# Altium PCB OLED_Xplained_PRO.PcbDoc
Units mm, origin at the board's own origin, x right, y up, seen from the top; angles counter-clockwise.
Board outline 60 x 66.5 mm, 2 copper layers (Top Layer LF-signals, Bottom Layer LF-signals), stack 1.58 mm thick; 36 components, 28 nets, 126 pads, 32 vias.
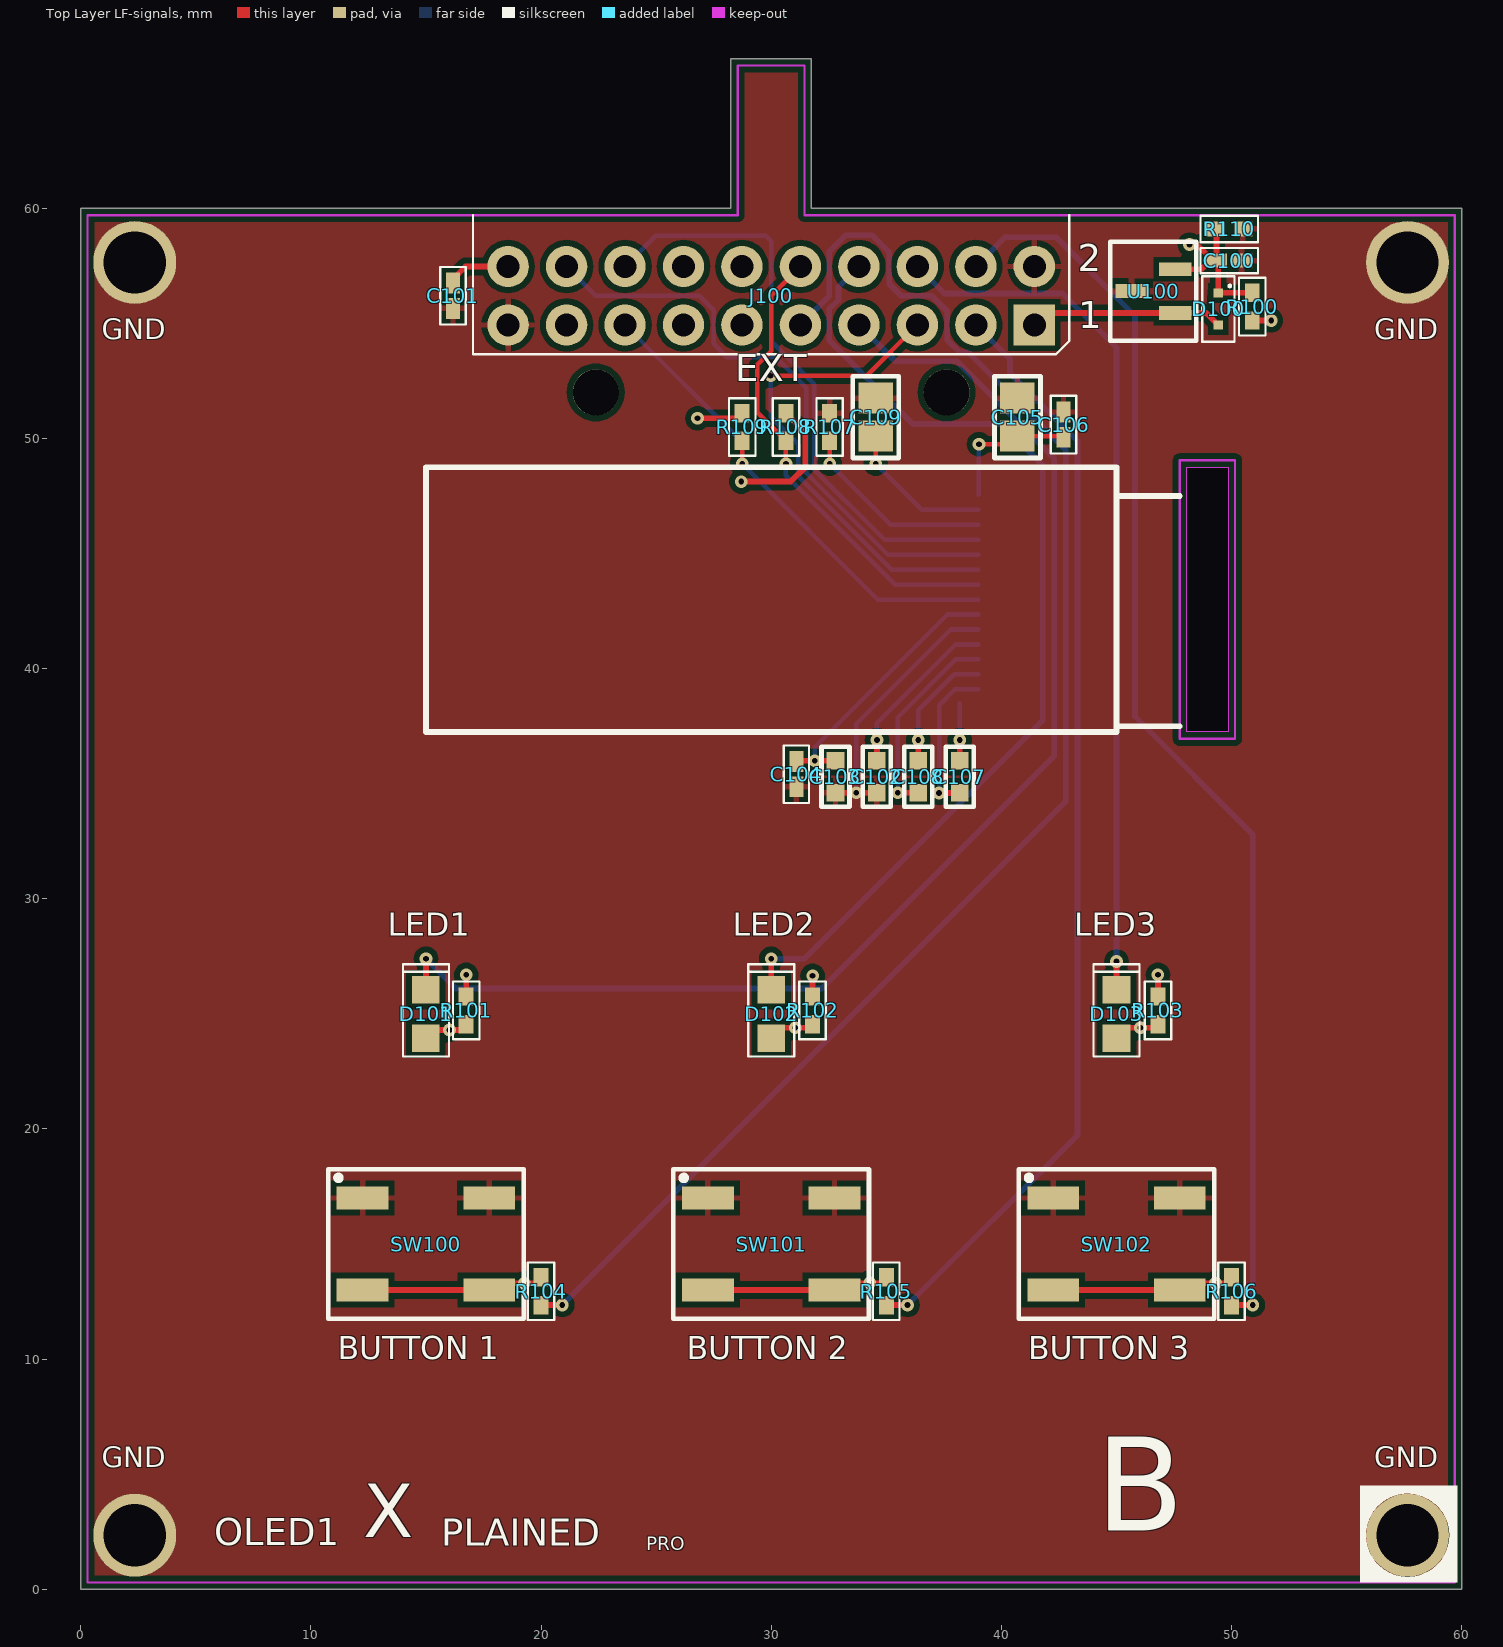
[diagram p0: Top Layer LF-signals view]
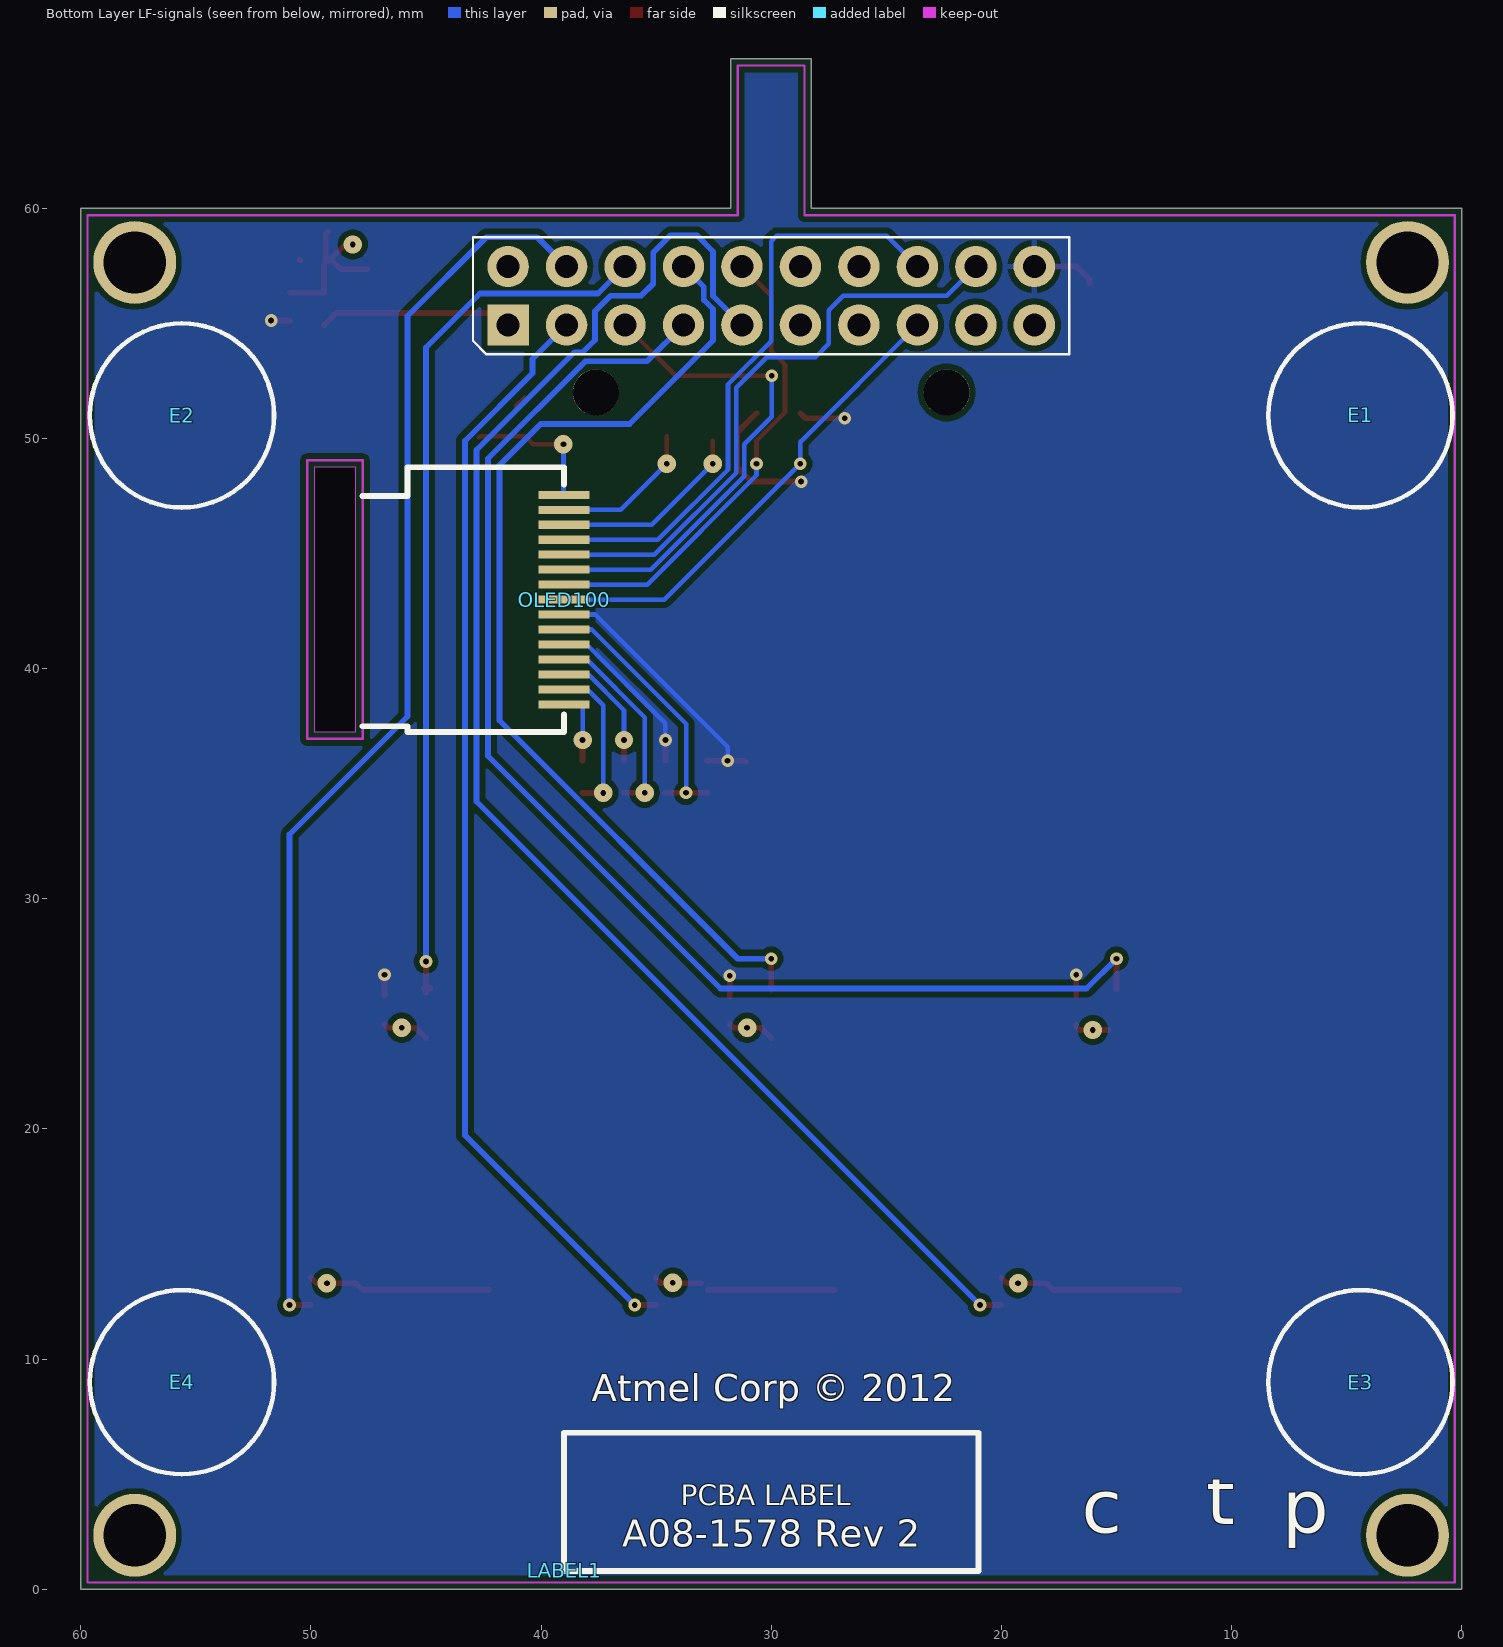
[diagram p1: Bottom Layer LF-signals view, seen from below]

## Layer stack, top to bottom
Top Solder: solder mask 0.0102, Solder Resist, Dk 3.5
Top Layer LF-signals: signal copper 0.035
Dielectric1: core 1.51, FR-4, Dk 4.8
Bottom Layer LF-signals: signal copper 0.035
Bottom Solder: solder mask 0.0102, Solder Resist, Dk 3.5

## Board outline
0,0 0,60 28.25,60 28.25,66.5 31.75,66.5 31.75,60 60,60 60,0
cut-out: 48.05,48.75 49.85,48.75 49.85,37.25 48.05,37.25

## Design rules (kind name [scope] priority, off if disabled: settings)
AcuteAngle [All] p1: minimum=8.50000000000000E+0001 checktracksonly=FALSE
AssemblyTestPointUsage [All] p1: allowmultiple=TRUE
AssemblyTestpoint [All] p1: testpointundercomponent=TRUE minsize=0.55 maxsize=2 preferedsize=0.8 minholesize=0 maxholesize=1 preferedholesize=0.25 testpointgrid=0.025 usegrid=FALSE gridtolerance=0 allowsidebottom=TRUE minspacing=1.27 compbodyclearance=0.127
Clearance Clearance_polygon [All vs InPolygon] p1: gap=0.25
Clearance [All] p2: gap=0.15
DiffPairsRouting [All] p1: maxlimit=0.3 minlimit=0.15 mostfreqgap=0.2 toplayer_minwidth=0.381 toplayer_maxwidth=0.381 toplayer_prefwidth=0.381 bottomlayer_minwidth=0.381 bottomlayer_maxwidth=0.381 bottomlayer_prefwidth=0.381 maxuncoupledlength=20
FabricationTestPointUsage TestPointUsage [All] p1: valid=0 allowmultiple=TRUE
FabricationTestpoint Testpoint [All] p1: side=2 testpointundercomponent=TRUE minsize=0.55 maxsize=2 preferedsize=0.8 minholesize=0 maxholesize=1 preferedholesize=0.25 testpointgrid=0 allowsidebottom=TRUE usegrid=FALSE gridtolerance=0 minspacing=1.27 compbodyclearance=0.127
HoleSize [All] p1: absolutevalues=TRUE maxlimit=10 minlimit=0.25 maxpercent=80.000 minpercent=20.000
HoleToHoleClearance [All] p1: gap=0.45 allowstackedmicrovias=TRUE
MinimumAnnularRing [All] p1: minimumring=0.15
MinimumSolderMaskSliver [All] p1: minsoldermaskwidth=0.1
PlaneClearance [All] p1: clearance=0.3
PlaneConnect PlaneConnect_VIA [IsVia] p1: planeconnectstyle=Direct reliefexpansion=0.508 reliefentries=4 reliefconductorwidth=0.254 reliefairgap=0.254
PlaneConnect PlaneConnect_MNT [All] p2: planeconnectstyle=Direct reliefexpansion=0.508 reliefentries=4 reliefconductorwidth=0.254 reliefairgap=0.254
PlaneConnect [All] p3: planeconnectstyle=Relief reliefexpansion=0.508 reliefentries=4 reliefconductorwidth=0.254 reliefairgap=0.254
PolygonConnect PolygonConnect_VIA [IsVia OR HasPad('Free-666')] p1: connectstyle=Direct reliefconductorwidth=0.254 reliefentries=4 polygonreliefangle="90 Angle" airgapwidth=0.254
PolygonConnect [All] p2: connectstyle=Relief reliefconductorwidth=0.254 reliefentries=4 polygonreliefangle="90 Angle" airgapwidth=0.254
RoutingVias [All] p1: holewidth=0.25 width=0.55 viastyle="Through Hole" minholewidth=0.25 minwidth=0.55 maxholewidth=0.5 maxwidth=1
SMDNeckDown [All] p1: percent=70.000
SilkToSilkClearance SilkToSilkClearance_Text [IsText] p1: silktosilkclearance=0
SilkToSilkClearance [All] p2: silktosilkclearance=0.1
SilkToSolderMaskClearance SilkscreenOverComponentPads [IsPad] p1: minsilkscreentomaskgap=0.1 clearancetoexposedcopper=TRUE
SolderMaskExpansion SolderMaskTenting [IsVia AND NOT (IsFabTestpoint OR IsAssyTestpoint)] p1: expansion=-1
SolderMaskExpansion [All] p2: expansion=0.1
ViasUnderSMD [All] p1: allowed=FALSE
Width [All] p1: maxlimit=10 minlimit=0.175 preferedwidth=0.25 minimp=50.000000 maximp=50.000000 favimp=50.000000
18 further rules are at their usual default settings.

## Classes and differential pairs
component class OLED_Xplained_PRO_Connector: C100 C101 C102 C103 C104 C105 C106 C107 C108 C109 D100 D101 D102 D103 J100 OLED100 R100 R101 R102 R103 R104 R105 R106 R107 R108 R109 R110 SW100 SW101 SW102 U100
component class OLED_Xplained_PRO_TopLevel: E1 E2 E3 E4 LABEL1

## Components (designator, comment, footprint, x,y, rotation, side; value= is the part's Value field where it differs from the comment)
C100 "CAP-NONPOL" AP1-00001 49.9,57.725 r0 top
C101 "CAP-NONPOL" AP1-00001 16.175,56.2 r90 top
C102 "1uF" AP1-00039 34.593,35.303 r270 top
C103 "1uF" AP1-00039 32.793,35.303 r270 top
C104 "100n" AP1-00001 31.093,35.414 r270 top
C105 "Generic part, no manufacturer specified." AP1-00003 40.7,50.925 r90 top
C106 "100n" AP1-00001 42.7,50.6 r90 top
C107 "1uF" AP1-00039 38.192,35.303 r270 top
C108 "1uF" AP1-00039 36.393,35.303 r270 top
C109 "Generic part, no manufacturer specified." AP1-00003 34.54,50.925 r90 top
D100 "Farnell# 1615809" AP4-00036 49.425,55.625 r270 top
D101 "Yellow" AP4-00013 15,25 r270 top
D102 "Yellow" AP4-00013 30,25 r270 top
D103 "Yellow" AP4-00013 45,25 r270 top
E1 "RUBBER FEET" AP8-00192 4.4,51 r180 bottom
E2 "RUBBER FEET" AP8-00192 55.6,51 r180 bottom
E3 "RUBBER FEET" AP8-00192 4.4,9 r180 bottom
E4 "RUBBER FEET" AP8-00192 55.6,9 r180 bottom
J100 "HEADER-2X10" AP8-00621 30,56.2 r0 top
LABEL1 "PCBA_LABEL" AP8-00317 39,0.8 r180 bottom
OLED100 "UG-2832HSWEG04" AP9-00080 28,43 r0 top
R100 "R2" AP2-00000 50.9,55.725 r270 top
R101 "R2" AP2-00000 16.75,25.155 r90 top
R102 "R2" AP2-00000 31.8,25.155 r90 top
R103 "R2" AP2-00000 46.8,25.155 r90 top
R104 "R2" AP2-00000 20,12.95 r90 top
R105 "R2" AP2-00000 35,12.95 r90 top
R106 "R2" AP2-00000 50,12.95 r90 top
R107 "390k" AP2-00000 32.54,50.5 r90 top
R108 "100k" AP2-00000 30.64,50.5 r90 top
R109 "100k" AP2-00000 28.74,50.5 r90 top
R110 "R2" AP2-00000 49.9,59.1 r180 top
SW100 "SKRAAKE010" AP8-00137 15,15 r0 top
SW101 "SKRAAKE010" AP8-00137 30,15 r0 top
SW102 "SKRAAKE010" AP8-00137 45,15 r0 top
U100 "ATSHA204_SOT23" AP4-00018 46.6,56.4 r180 top

## Footprints (in the part's own frame and the unit in brackets; to place one, negate y for a bottom-side part, rotate by r counter-clockwise, add the part's x,y. Pads: shape width x height; smd on the part's side, far side on the other; paste and mask are expansions set on the pad)
AP1-00001 [mm] "Standard 0402 SMD capacitor footprint"
  rect 0.9x0.6 smd: 1(-0.55,0) 2(0.55,0)
  silkscreen extent -1.25,-0.55 1.25,0.55, body extent -0.5,-0.3 0.5,0.3, height 0.2
AP1-00003 [mm]
  rect 1.35x1.5 smd: 1(-0.825,0) 2(0.825,0)
  silkscreen extent -1.78,-1 1.78,1, body extent -1,-0.63 1,0.63, height 0.78
AP1-00039 [mil] "Capacitor 0603 Hight 0.8mm"
  rect 30x30 smd: 1(-27.5,0) 2(27.5,0)
  silkscreen extent -52,-24 51,24, body extent -31,-16 32,16, height 12
AP2-00000 [mm] "Standard 0402 SMD resistor footprint"
  rect 0.8x0.65 smd: 1(-0.6,0) 2(0.6,0)
  silkscreen extent -1.25,-0.58 1.25,0.58, body extent -0.5,-0.3 0.5,0.3, height 0.2
AP4-00013 [mm] "0805 diode footprint"
  rect 1.2x1.2 smd: 1(-1.05,0) 2(1.05,0)
  silkscreen extent -2.16,-1 1.85,1, body extent -1,-0.63 1,0.63, height 1.1
AP4-00018 [mm]
  rect 1.4x0.6 smd: 1(-0.95,0.95) 2(-0.95,-0.95) 3(0.95,0)
  silkscreen extent -1.88,-2.15 1.88,2.15, body extent -1.25,-1.46 1.23,1.46, height 1
AP4-00036 [mm] "Molded Diode, 2-Leads, Body 1,2x0,8mm, IPC Medium Density"
  rect 0.4x0.4 smd: 1(-0.7,0) 2(0.7,0)
  silkscreen extent -1.43,-0.7 1.43,0.7, body extent -0.8,-0.4 0.8,0.4, height 0.7
AP8-00137 [mm]
  rect 2.25x1 smd: 1(-2.75,2) 2(2.75,2) 3(-2.75,-2) 4(2.75,-2)
  silkscreen extent -4.25,-3.25 4.25,3.25, body extent -3.1,-3.1 3.1,3.1, height 3.4
AP8-00192 [mm]
  silkscreen extent -4,-4 4,4, body extent -3.97,-3.99 4,3.99, height 2.79
AP8-00317 [mm] "Placement area for 18x6mm sticker"
  silkscreen extent 0,0 18,6
AP8-00621 [mm] "2x5 Receptacle THM, Right Angle. No Guide. 2.54mm pitch. Length 13.2mm, width 5.0mm, height 5mm"
  rect 1.8x1.8 hole 1: 1(11.43,-1.27)
  round 1.8 hole 1: 2(11.43,1.27) 3(8.89,-1.27) 4(8.89,1.27) 5(6.35,-1.27) 6(6.35,1.27) 7(3.81,-1.27) 8(3.81,1.27) 9(1.27,-1.27) 10(1.27,1.27) 11(-1.27,-1.27) 12(-1.27,1.27) 13(-3.81,-1.27) 14(-3.81,1.27) 15(-6.35,-1.27) 16(-6.35,1.27) 17(-8.89,-1.27) 18(-8.89,1.27) 19(-11.43,-1.27) 20(-11.43,1.27)
  rect 2.1x2.1 on Top Paste: 19(-11.43,-1.27) 19(-11.43,1.27) 19(-8.89,-1.27) 19(-8.89,1.27) 19(-6.35,-1.27) 19(-6.35,1.27) 19(-3.81,-1.27) 19(-3.81,1.27) 19(-1.27,-1.27) 19(-1.27,1.27) 19(1.27,-1.27) 19(1.27,1.27) 19(3.81,-1.27) 19(3.81,1.27) 19(6.35,-1.27) 19(6.35,1.27) 19(8.89,-1.27) 19(8.89,1.27) 19(11.43,-1.27) 19(11.43,1.27)
  body extent -12.95,-1.71 12.95,11.07, height 4.98
AP9-00080 [mm]
  rect 2.2x0.35 smd far side: 1(11,-4.55) 2(11,-3.9) 3(11,-3.25) 4(11,-2.6) 5(11,-1.95) 6(11,-1.3) 7(11,-0.65) 8(11,0) 9(11,0.65) 10(11,1.3) 11(11,1.95) 12(11,2.6) 13(11,3.25) 14(11,3.9) 15(11,4.55)
  silkscreen extent -13,-5.75 19.75,5.75, body extent -13,-5.75 17,5.75, height 1.46

## Part data
C100 C101: library part A01-0485, "Ceramic capacitor, SMD 0402, X5R, 6.3V, +/-10%"
C102 C103 C107 C108: library part A01-0353, "Ceramic capacitor, SMD 0603, X5R, 16V, 10% (de19763)"
C104 C106: library part A01-0246, "Ceramic capacitor, SMD 0402, X7R, 16V, +/-10%"
C105 C109: library part A01-0486, "Ceramic capacitor, SMD 0805, X7R, 16V, 10%,"
D100: library part A04-0049, "Schottky diode, If:200mA, Vf:0.35V, Vrrm:30V, SOD-523"
D101 D102 D103: library part A10-0019, "LED, Yellow, Wave length=591nm, SMD 0805, ±70°"
E1 E2 E3 E4: library part A08-0053, "2.8mm adhesive feet,diam 8.0mm"
J100: library part A08-1512, "2x10, female pin header receptable, right-angled, 2.54mm pitch, THM, Pin In Paste"
LABEL1: library part A09-0611, "PCBA identification label PP Top White Gloss"
OLED100: library part A10-0089, "OLEDisplay Module, 128x32 pixels"
R100: library part A02-0163, "Thick film resistor, SMD 0402, 1/16W, 1%"
R101 R102 R103: library part A02-0208, "Thick film resistor, SMD 0402, 1/16W, 1%"
R104 R105 R106: library part A02-0178, "Thick film resistor, SMD 0402, 1/16W, 1%"
R107: library part A02-0274, "Thick film resistor, SMD 0402, 1/16W, 1%"
R108 R109 R110: library part A02-0260, "Thick film resistor, SMD 0402, 1/16W, 1%"
SW100 SW101 SW102: library part A08-0790, "6.2x6.2 mm SMD tact switch, same as A08-0091 but less force is needed"
U100: library part A06-0571, "ATSHA204 with 1-wire interface and SOT23-3 package"

## Free pads (board coordinates)
  round 2 hole 2 unplated: 4(22.38,52) 5(37.62,52)
  round 3.6 hole 2.7 paste-2.6: 666(2.35,2.35) 666(2.35,57.65) 666(57.65,2.35) 666(57.65,57.65)

## Via types
v1: diameter 0.55/0.8 (per signal layer), hole 0.25, Top Layer LF-signals to Bottom Layer LF-signals, tented top, 14 vias
v2: diameter 0.55, hole 0.25, Top Layer LF-signals to Bottom Layer LF-signals, tented top, 13 vias
v3: diameter 0.55, hole 0.25, Top Layer LF-signals to Bottom Layer LF-signals, 4 vias
v4: diameter 0.55, hole 0.25, Top Layer LF-signals to Bottom Layer LF-signals, tented both sides, 1 vias

## Nets (pads, with @x,y where several pads share a name; then routed paths per layer and width w, separated by ;. In a path a pad name is that pad's centre, name@x,y a point inside that pad or via, vN(x,y) a via of type N, cw(c..) or ccw(c..) an arc to the next point about the centre after c; other vN are vias at no path point)
BUTTON1: J100.9 R104.1 | length 66.8
  Top Layer LF-signals w0.25: R104.1 v2(20.925,12.35)
  Bottom Layer LF-signals w0.25: v2(20.925,12.35) 42.8,34.225 42.8,49.5 38.55,53.75 38.175,53.75 37.65,54.275 37.65,55.525 36.975,56.2 35.65,56.2 35.125,56.725 35.125,58.075 34.375,58.825 33.225,58.825 32.525,58.125 32.525,56.185 J100.9
BUTTON2: J100.3 R105.1 | length 48.4
  Top Layer LF-signals w0.25: R105.1 v2(35.925,12.35)
  Bottom Layer LF-signals w0.25: v2(35.925,12.35) 43.305,19.73 43.305,49.895 40.37,52.83 40.37,53.45 J100.3
BUTTON3: J100.4 R106.1 | length 54.9
  Top Layer LF-signals w0.25: R106.1 v2(50.925,12.35)
  Bottom Layer LF-signals w0.25: J100.4 40.162,58.742 42.383,58.742 45.8,55.325 45.8,37.925 50.925,32.8 v2(50.925,12.35)
C1N: C108.2 OLED100.4 | length 8.7
  Top Layer LF-signals w0.25: v1(35.498,34.605) C108.2
  Bottom Layer LF-signals w0.2: v1(35.498,34.605) 35.498,37.877 38.021,40.4 OLED100.4
C1P: C108.1 OLED100.3 | length 5.4
  Top Layer LF-signals w0.25: C108.1 v1(36.393,36.9)
  Bottom Layer LF-signals w0.2: v1(36.393,36.9) 36.393,38.193 37.95,39.75 OLED100.3
C2N: C107.2 OLED100.2 | length 6.7
  Top Layer LF-signals w0.25: v1(37.293,34.6) 38.187,34.6 C107.2
  Bottom Layer LF-signals w0.2: v1(37.293,34.6) 37.293,38.407 37.986,39.1 OLED100.2
C2P: C107.1 OLED100.1 | length 2.5
  Top Layer LF-signals w0.25: C107.1 v1(38.192,36.9)
  Bottom Layer LF-signals w0.2: v1(38.192,36.9) 38.192,38.492 OLED100.1@38.2,38.5
D\I\S\P\L\A\Y\_\R\E\S\E\T\: J100.10 OLED100.9 R108.1 | length 20.7
  Top Layer LF-signals w0.2: v2(30.64,48.9) R108.1 29.4,51.14 29.4,53.2 30,53.8 30,56.2 J100.10
  Bottom Layer LF-signals w0.2: v2(30.64,48.9) 30.64,48.396 35.386,43.65 OLED100.9
D\I\S\P\L\A\Y\_\S\S\: J100.15 OLED100.8 R109.1 | length 22.2
  Top Layer LF-signals w0.2: v2(28.74,48.9) R109.1
  Top Layer LF-signals w0.25: J100.15@23.4,54.68 J100.15
  Bottom Layer LF-signals w0.2: J100.15 28.74,49.84 v2(28.74,48.9) 34.64,43 OLED100.8
DATA_CMD_SEL: J100.5 OLED100.10 | length 21.7
  Top Layer LF-signals w0.2: v3(29.975,52.725) 34.145,52.725 J100.5
  Bottom Layer LF-signals w0.2: v3(29.975,52.725) 29.975,50.94 31.175,49.74 31.175,48.356 35.231,44.3 OLED100.10
GND: C100.2 C101.1 C102.2 C103.2 C104.2 C105.2 C106.2 C109.2 J100.2 J100.19@18.57,54.93 OLED100.6 pad.666 R107.2 R110.1 SW100.1 SW100.2 SW101.1 SW101.2 SW102.1 SW102.2 U100.3 | length 12.4
  Top Layer LF-signals w0.25: C103.2@32.788,34.6 C103.2 C102.2 ; C105.2 C105.2@41.05,51.4 ; C100.2 C100.2@50.5,57.775
  Bottom Layer LF-signals w0.2: v3@33.693,34.605 33.693,37.593 37.8,41.7 OLED100.6
  other v3: 33.7,34.605
ID: D100.2 J100.1 U100.1 | length 7.7
  Top Layer LF-signals w0.25: J100.1@41.95,55.45 U100.1 48.9,55.45 D100.2
IREF: OLED100.13 R107.1 | length 8.6
  Top Layer LF-signals w0.2: v1(32.54,48.9) R107.1
  Bottom Layer LF-signals w0.2: v1(32.54,48.9) 35.19,46.25 OLED100.13
LED1: D101.1 J100.7 | length 57.2
  Top Layer LF-signals w0.25: D101.1 v2(15,27.4)
  Bottom Layer LF-signals w0.25: v2(15,27.4) 16.3,26.1 32.2,26.1 42.3,36.2 42.3,49.123 38.073,53.35 35.39,53.35 J100.7
LED2: D102.1 J100.8 | length 43.8
  Top Layer LF-signals w0.25: D102.1 v2(30,27.4)
  Bottom Layer LF-signals w0.25: v2(30,27.4) 31.45,27.4 41.8,37.75 41.8,48.834 40.009,50.625 36.15,50.625 32.525,54.25 32.525,55.619 32.925,56.019 32.925,56.585 J100.8
LED3: D103.1 J100.6 | length 38.4
  Top Layer LF-signals w0.25: D103.1@44.8,26.1 D103.1@45.1,26.1 ; D103.1@45,25.925 v2(45,27.275)
  Bottom Layer LF-signals w0.25: J100.6 37.525,56.295 41.917,56.295 41.922,56.3 42.65,56.3 45,53.95 v2(45,27.275)
NetC100_1: C100.1 D100.1 R100.1 R110.2 U100.2 | length 7.2
  Top Layer LF-signals w0.25: U100.2 48.7,57.35 49.075,57.725 C100.1@49.2,57.725 ; v1(48.175,58.425) 48.5,58.425 C100.1@49.2,57.725 ; R110.2@49.25,58.975 49.35,58.875 C100.1 C100.1@49.2,57.725 ; C100.1@49.425,57.525 D100.1 R100.1
NetD101_2: D101.2 R101.1 | length 1.6
  Top Layer LF-signals w0.25: D101.2@15.35,24.3 16.6,24.3 16.75,24.45 R101.1
  other v1: 16.025,24.3
NetD102_2: D102.2 R102.1 | length 2.1
  Top Layer LF-signals w0.25: D102.2 30.45,24.4 31.645,24.4 R102.1
  other v1: 31.048,24.4
NetD103_2: D103.2 R103.1 | length 2.1
  Top Layer LF-signals w0.25: D103.2 45.45,24.4 46.645,24.4 R103.1
  other v1: 46.048,24.4
NetR104_2: R104.2 SW100.3 SW100.4 | length 8
  Top Layer LF-signals w0.25: SW100.3 SW100.4 18.05,13.3 19.75,13.3 R104.2
  other v1: 19.275,13.3
NetR105_2: R105.2 SW101.3 SW101.4 | length 7.6
  Top Layer LF-signals w0.25: SW101.3 SW101.4 ; SW101.4@33.05,13.3 34.8,13.3 35,13.5 R105.2
  other v1: 34.275,13.325
NetR106_2: R106.2 SW102.3 SW102.4 | length 8
  Top Layer LF-signals w0.25: SW102.3 SW102.4 48.05,13.3 49.75,13.3 R106.2
  other v1: 49.3,13.3
OLED_VCC: C105.1 C106.1 OLED100.15 | length 6.1
  Top Layer LF-signals w0.2: v1(39.025,49.75) 40.35,49.75 C105.1 42.65,50.1 C106.1
  Bottom Layer LF-signals w0.2: OLED100.15 39.025,47.575 v1(39.025,49.75)
SPI_MOSI: J100.16 OLED100.12 | length 26.1
  Bottom Layer LF-signals w0.2: J100.16 24.98,58.8 29.769,58.8 30,58.569 30,54.225 31.875,52.35 31.875,48.646 34.921,45.6 OLED100.12
SPI_SCK: J100.18 OLED100.11 | length 26.1
  Bottom Layer LF-signals w0.2: J100.18 22.38,56.2 26.875,56.2 27.5,55.575 27.5,54.11 28.075,53.535 30.195,53.535 31.525,52.205 31.525,48.501 35.076,44.95 OLED100.11
VCC_TARGET: C101.2 C102.1 C103.1 C104.1 J100.20 OLED100.5 OLED100.7 R100.2 R101.2 R102.2 R103.2 R108.2 R109.2 | length 33.3
  Top Layer LF-signals w0.25: C101.2 16.175,56.92 16.725,57.47 J100.20 ; R101.2@16.751,25.801 v2(16.751,26.699) ; v3(26.8,50.875) 28.515,50.875 R109.2 ; v3(28.7,48.125) 30.85,48.125 31.475,48.75 31.475,50.265 R108.2 ; C104.1 31.131,36.002 v2(31.893,36.002) C103.1 ; R102.2 v2(31.8,26.652) ; C102.1 34.594,36.003 v2(34.594,36.901) ; R103.2@46.801,25.801 v2(46.801,26.699) ; R100.2 v4(51.725,55.125)
  Bottom Layer LF-signals w0.2: v2(31.893,36.002) 31.893,36.593 37.65,42.35 OLED100.7 ; v2(34.594,36.901) 34.594,37.623 38.021,41.05 OLED100.5
VCOMH: C109.1 OLED100.14 | length 6.5
  Top Layer LF-signals w0.2: v1(34.54,48.9) C109.1
  Bottom Layer LF-signals w0.2: v1(34.54,48.9) 36.54,46.9 OLED100.14
pads on no net: J100.11 J100.12 J100.13 J100.14 J100.17 J100.19@18.57,54.93 J100.19@18.57,57.47 J100.19@21.11,54.93 J100.19@21.11,57.47 J100.19@23.65,54.93 J100.19@23.65,57.47 J100.19@26.19,54.93 J100.19@26.19,57.47 J100.19@28.73,54.93 J100.19@28.73,57.47 J100.19@31.27,54.93 J100.19@31.27,57.47 J100.19@33.81,54.93 J100.19@33.81,57.47 J100.19@36.35,54.93 J100.19@36.35,57.47 J100.19@38.89,54.93 J100.19@38.89,57.47 J100.19@41.43,54.93 J100.19@41.43,57.47

## Polygon pours and split planes (outlines as drawn)
VCC_TARGET on Bottom Layer LF-signals "Mechanical 1-No Net 1" (solid, remove dead copper, pour order 2): 0,13.25 0,60 28.25,60 28.25,66.5 31.75,66.5 31.75,60 60,60 60,0 0,0
no net on Top Overlay "Top Overlay-No Net" (solid): 59.8,0.3 55.6,0.3 55.6,4.5 59.8,4.5
GND on Top Layer LF-signals "Mechanical 1-No Net" (solid, remove dead copper, pour order 4): 0,13.25 0,60 28.25,60 28.25,66.5 31.75,66.5 31.75,60 60,60 60,0 0,0

## Keep-outs
Keep-Out Layer:
  pour cut-out: 47.75,49.05 50.15,49.05 50.15,36.95 47.75,36.95
  lines w0.1: 0.3,0.3 59.7,0.3 59.7,59.7 31.45,59.7 31.45,66.2 28.55,66.2 28.55,59.7 28.5,59.7 28.2,59.7 0.3,59.7 0.3,0.3 ; 47.75,36.95 50.15,36.95 50.15,49.05 47.75,49.05 47.75,36.95

## Other copper
Bottom Layer LF-signals:
  pour cut-out: 40.1,42.525 40.25,42.525 40.25,42.129 40.25,41.271 40.25,40.875 40.1,40.875
Multi-Layer:
  pour cut-out: 48.05,48.75 49.85,48.75 49.85,37.25 48.05,37.25

## Silkscreen, mask and mechanical layers (free items; w line width, h text height)
Top Overlay:
  drawing of 6 lines, arcs and shapes, not listed
  text "2" at 43.325,56.875 h2
  text "1" at 43.35,54.4 h2
  text "GND" at 0.906,54 h1.52
  text "GND" at 56.206,54 h1.52
  text "EXT" at 28.436,52.1 h2
  text "LED1" at 13.334,28.4 h1
  text "LED2" at 28.334,28.4 h1
  text "LED3" at 43.167,28.4 h1
  text "BUTTON 1" at 11.168,10 h1
  text "BUTTON 2" at 26.335,10 h1
  text "BUTTON 3" at 41.168,10 h1
  text "GND" at 0.906,5 h1.52
  text "GND" at 56.206,5 h1.52
  text "OLED1" at 5.8,1.525 h2
  text "X" at 12.275,1.5 h4
  text "PLAINED" at 15.675,1.5 h2
  text "PRO" at 24.575,1.512 h1
  text "B" at 44.1,1.2 h7
Bottom Overlay:
  lines w0.1: 17.046,53.652 42.364,53.652 42.954,54.242 42.954,58.742 17.046,58.742 17.046,53.652
  lines w0.254: 45.8,37.5 47.75,37.5
  text "Atmel Corp © 2012" at 37.8,7.775 h2
  text "t" at 11.1,2.1 h4
  text "p" at 7.8,1.7 h4
  text "c" at 16.5,1.7 h4
  text "A08-1578 Rev 2" at 36.479,1.45 h2
Mechanical 1:
  lines w0.1: 0,0 0,13.25 0,60 28.25,60 28.25,66.5 31.75,66.5 31.75,60 60,60 60,0 0,0 ; 48.05,37.25 49.85,37.25 49.85,48.75 48.05,48.75 48.05,37.25
Mechanical 4:
  text "Testpoint Placement" at 106.75,-19.475 h5
  text "Mechanical Dimensions" at -122.7,-24.725 h5
  text "Connector Placement" at -0.4,-27.9 h5
  text "User Interface Connector (Female)" at 17.8,-48.8 h1
  text "User Interface Connector (Male)" at 18.2,-90.7 h1
Mechanical 6:
  drawing of 171 lines, arcs and shapes, not listed
Mechanical 16:
  lines w0.127: -159,-66.915 -153.92,-66.915 ; -159,3.745 -153.92,3.745 ; -159,74.23 -153.92,74.23 ; -109.724,-137.4 -109.724,-132.32 ; -109.724,139.46 -109.724,144.54 ; -65.7,139.46 -65.7,144.54 ; -60.575,-137.4 -60.575,-132.32 ; -16.525,139.46 -16.525,144.54 ; -11.426,-137.4 -11.426,-132.32 ; 37.85,-137.4 37.85,-132.32 ; 37.85,139.46 37.85,144.54 ; 86.999,-137.4 86.999,-132.32 ; 86.999,139.46 86.999,144.54 ; 115.32,-124.7 229.62,-124.7 ; 115.32,-117.08 229.62,-117.08 ; 115.32,-109.46 153.42,-109.46 ; 136.148,-137.4 136.148,-132.32 ; 136.148,139.46 136.148,144.54 ; 153.42,-132.32 153.42,-117.08 153.42,-101.84 ; 185.424,-137.4 185.424,-132.32 ; 185.424,139.46 185.424,144.54 ; 206.76,-132.32 206.76,-117.08 ; 229.62,-66.915 234.7,-66.915 ; 229.62,3.7 234.7,3.7 ; 229.62,74.185 234.7,74.185 ; 115.32,-132.32 79.76,-132.32 79.76,-101.84 115.32,-101.84 ; 115.32,-132.32 229.62,-132.32 ; 115.32,-132.32 115.32,-101.84 ; 115.32,-101.84 153.42,-101.84 ; 153.42,-101.84 229.62,-101.84 229.62,-132.32 ; 229.62,-132.32 -153.92,-132.32 -153.92,139.46 229.62,139.46 229.62,-132.32 ; -159,-137.4 -159,144.54 234.7,144.54 234.7,-137.4 -159,-137.4
  text "1" at -134.963,141.111 h0.67
  text "4" at 12.628,141.111 h0.67
  text "5" at 61.904,141.111 h0.67
  text "6" at 110.926,141.111 h0.67
  text "7" at 160.456,141.111 h0.67
  text "8" at 209.478,141.111 h0.67
  text "2" at -88.474,140.975 h0.67
  text "3" at -41.924,140.825 h0.67
  text "A" at -157.095,107.301 h0.67
  text "A" at 231.525,107.256 h0.67
  text "B" at 231.605,39.201 h0.67
  text "B" at -157.095,36.689 h0.67
  text "C" at -157.188,-31.488 h0.67
  text "C" at 231.975,-37.1 h0.67
  text "D" at -157.095,-104.202 h0.67
  text "D" at 231.525,-104.202 h0.67
  text "ENGINEER:" at 116.59,-104.38 h0.67
  text "TITLE:" at 154.69,-104.38 h0.67
  text "PCB DESIGNER:" at 116.59,-111.873 h0.67
  text "B" at 82.525,-116.65 h20
  text "DATE:" at 116.59,-119.62 h0.67
  text "PART NO.:" at 154.69,-119.62 h0.67
  text "REV:" at 208.03,-119.62 h0.67
  text "ATMEL NORWAY" at 82.575,-120.25 h0.67
  text "Vestre Rosten 79" at 82.545,-122.328 h0.67
  text ".PRINT_DATE" at 116.7,-123.5 h0.67
  text "N-7075 Tiller" at 82.545,-125.63 h0.67
  text "FILE NAME:" at 116.59,-127.24 h0.67
  text "DWG NO:" at 154.69,-127.24 h0.67
  text "SCALE:" at 208.03,-127.24 h0.67
  text ".PCB_FILE_NAME_NO_PATH" at 117.86,-130.288 h0.67
  text "2" at -85.34,-135.688 h0.67
  text "3" at -35.81,-135.688 h0.67
  text "4" at 13.212,-135.688 h0.67
  text "5" at 61.904,-135.688 h0.67
  text "6" at 110.926,-135.688 h0.67
  text "7" at 160.456,-135.688 h0.67
  text "8" at 209.478,-135.688 h0.67

## Dimensions
-103.905,-45.078 to -107.824,-48.997 on Mechanical 4
-120.125,-42.35 to -126.3,-39.4 on Mechanical 4
-122.475,-100 to -64.825,-99 on Mechanical 4
-122.475,-100 to -120.125,-99 on Mechanical 4
-121.475,-42.35 to -122.475,-100 on Mechanical 4
-121.475,-97.65 to -122.475,-100 on Mechanical 4
0,-100 to 30,-94.992 on Mechanical 4
29.5,-94.5 to 0,-100 on Mechanical 4
0,-40 to 29.5,-43.8 on Mechanical 4
30,-43.292 to 0,-40 on Mechanical 4
-122.475,-100 to -62.475,-100 on Mechanical 4
-62.475,-100 to -62.475,-40 on Mechanical 4
-94.225,-33.5 to -122.475,-40 on Mechanical 4
-90.725,-33.5 to -94.225,-33.5 on Mechanical 4
-62.475,-40 to -90.725,-33.5 on Mechanical 4

## Text inside footprints (layer, text, board x,y; h text height)
LABEL1: Bottom Overlay "PCBA LABEL" at 33.92,3.34 h1.52